# Altium PCB StudentForce.PcbDoc
Units mm, origin at the board's own origin, x right, y up, seen from the top; angles counter-clockwise.
Board outline 90 x 50 mm, 2 copper layers (Top Layer, Bottom Layer); 85 components, 55 nets, 268 pads, 87 vias.
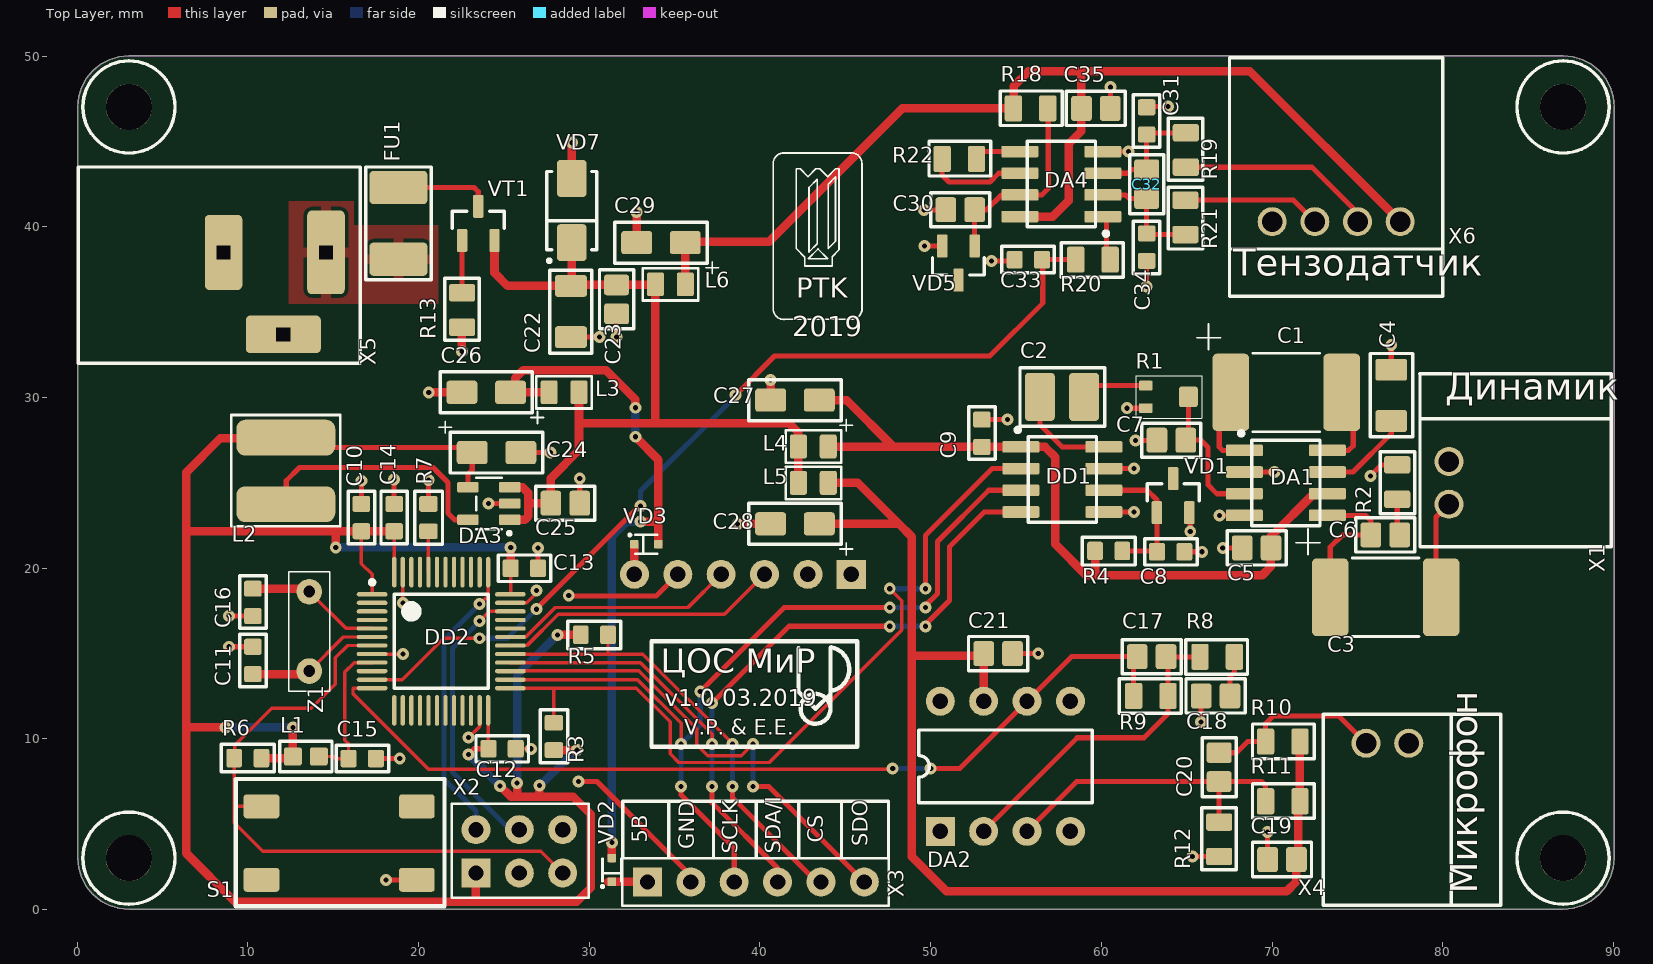
[diagram p0: Top Layer view]
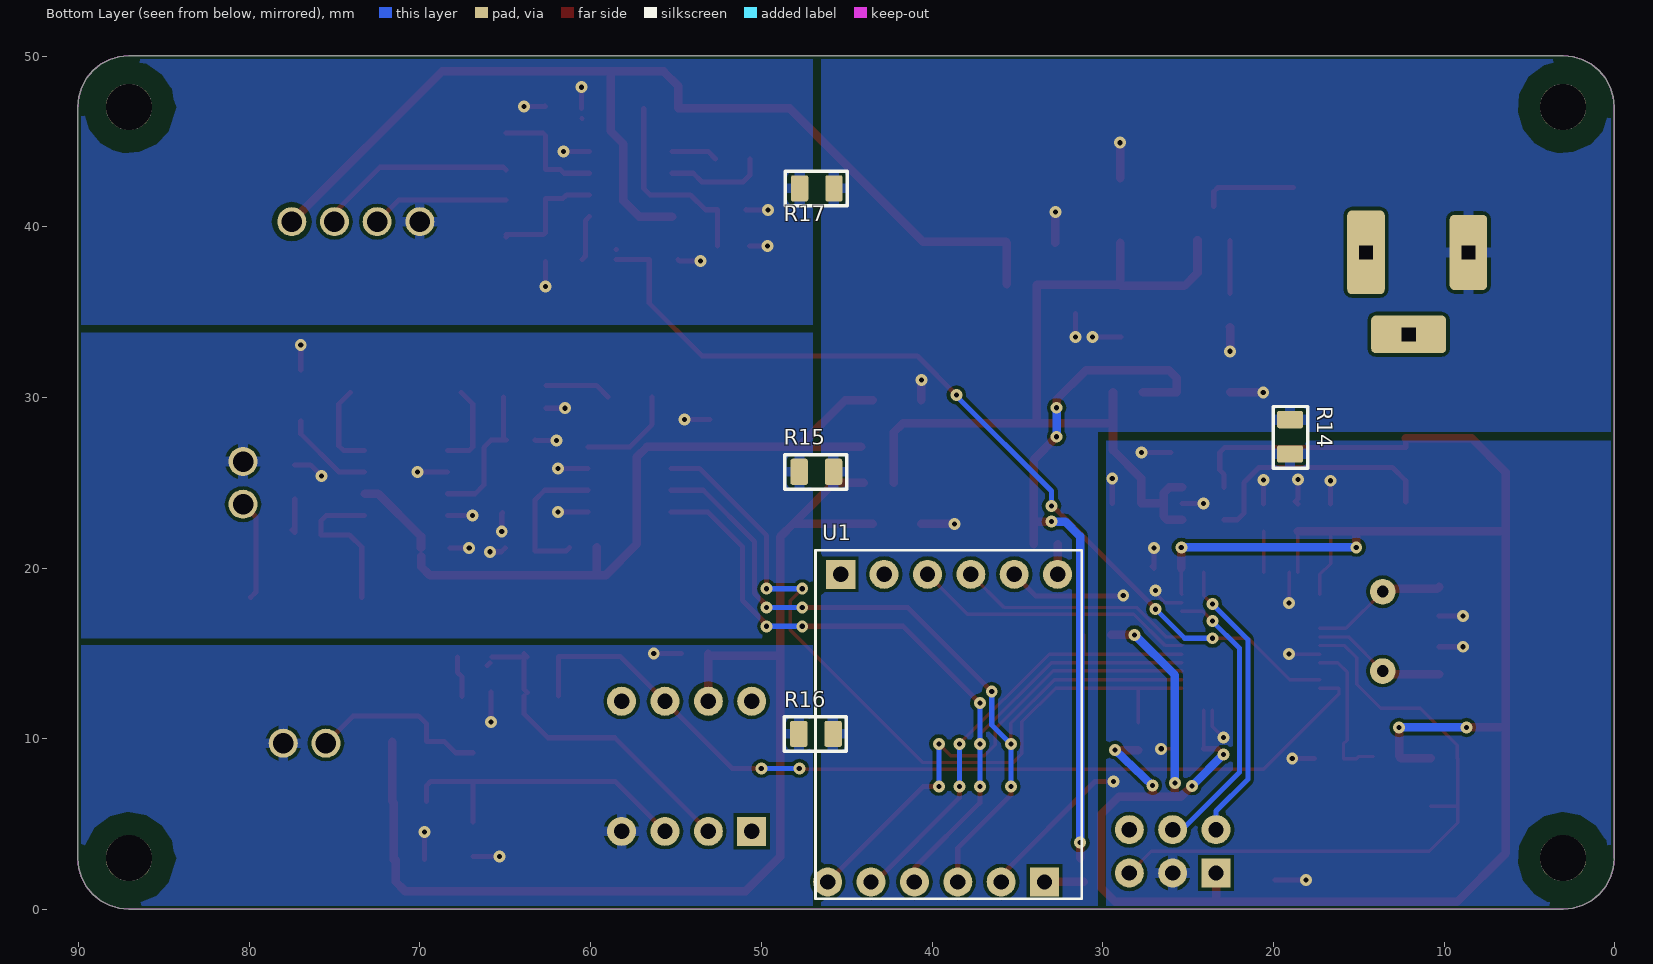
[diagram p1: Bottom Layer view, seen from below]

## Layer stack, top to bottom
Top Solder: solder mask 0.0102, Solder Resist, Dk 3.5
Top Layer: signal copper 0.0356
Dielectric 1: dielectric 0.32, FR-4, Dk 4.8
Bottom Layer: signal copper 0.0356
Bottom Solder: solder mask 0.0102, Solder Resist, Dk 3.5

## Board outline
0.544,1.352 0.266,1.871 0.096,2.434 0.038,3.019 0.038,47.019 0.096,47.604 0.266,48.167 0.544,48.686 0.917,49.14 1.371,49.513 1.89,49.791 2.453,49.961 3.038,50.019 87.038,50.019 87.623,49.961 88.186,49.791 88.705,49.513 89.159,49.14 89.532,48.686 89.81,48.167 89.98,47.604 90.038,47.019 90.038,3.019 89.98,2.434 89.81,1.871 89.532,1.352 89.159,0.898 88.705,0.525 88.186,0.247 87.623,0.077 87.038,0.019 3.038,0.019 2.453,0.077 1.89,0.247 1.371,0.525 0.917,0.898

## Design rules (kind name [scope] priority, off if disabled: settings)
Clearance Clearance_GND [InNet('5B') vs InNet('GND')] p1: gap=0.4 ignorepadtopadclearanceinfootprint=FALSE
Clearance Clearance_AGND_D [InNet('5BA_D') vs InNet('AGND_D')] p2: gap=0.4 ignorepadtopadclearanceinfootprint=FALSE
Clearance Clearance_AGND_M [InNet('5BA_M') vs InNet('AGND_M')] p3: gap=0.3 ignorepadtopadclearanceinfootprint=FALSE
Clearance Clearance_AGND_S [InNet('5BA_S') vs InNet('AGND_S')] p4: gap=0.3 ignorepadtopadclearanceinfootprint=FALSE
Clearance [All] p5: gap=0.2 ignorepadtopadclearanceinfootprint=FALSE
HoleSize [All] p1: absolutevalues=TRUE maxlimit=20 minlimit=0.025 maxpercent=80.000 minpercent=20.000
MinimumSolderMaskSliver [All] p1: minsoldermaskwidth=0.04
PasteMaskExpansion [All] p1: expansion=0.05
PolygonConnect PolygonConnect_via [All vs IsVia] p1: connectstyle=Direct reliefconductorwidth=0.254 reliefentries=4 polygonreliefangle="90 Angle" airgapwidth=0.254
PolygonConnect [All] p2: connectstyle=Relief reliefconductorwidth=0.6 reliefentries=4 polygonreliefangle="90 Angle" airgapwidth=0.2
RoutingVias [All] p1: holewidth=0.711 width=1.27 viastyle="Through Hole" minholewidth=0.711 minwidth=1.27 maxholewidth=0.711 maxwidth=1.27
SilkToSilkClearance [All] p1: silktosilkclearance=0
SilkToSolderMaskClearance [IsPad] p1: minsilkscreentomaskgap=0 clearancetoexposedcopper=TRUE
SolderMaskExpansion [All] p1: expansion=0.15
Width [All] p1: maxlimit=3 minlimit=0.15 preferedwidth=0.2
25 further rules are at their usual default settings.

## Classes and differential pairs
component class TensoStudent: C30 C31 C32 C33 C34 C35 C38 C39 C40 C41 C42 C44 C45 DA4 R18 R19 R20 R21 R22 VD5 X6
component class PowerStudent: C22 C23 C24 C25 C26 C27 C28 C29 DA3 FU1 L2 L3 L4 L5 L6 R13 R14 R15 R16 R17 VD7 VT1 X5
component class MicroStudent: C17 C18 C19 C20 C21 DA2 R8 R9 R10 R11 R12 X4
component class MCUStudent: C8 C9 C10 C11 C12 C13 C14 C15 C16 DD1 DD2 L1 R3 R4 R5 R6 R7 S1 U1 VD1 VD2 VD3 X2 X3 Z1
component class DynStudent: C1 C2 C3 C4 C5 C6 C7 DA1 R1 R2 X1

## Components (designator, comment, footprint, x,y, rotation, side; value= is the part's Value field where it differs from the comment)
C1 "Capacitor_pol" "TANTAL CASE D" 70.776,30.3 r0 top value=10мк
C2 "Capacitor" C1210 57.685,30.036 r0 top value=10мк
C3 "Capacitor_pol" "TANTAL CASE D" 76.6,18.3 r0 top value=220мк
C4 "Capacitor" C1206 77,30.1 r270 top value=10мк
C5 "Capacitor" C0805 69.087,21.188 r0 top value=0,1мк
C6 "Capacitor" C0805 76.625,21.95 r180 top value=0,15мк
C7 "Capacitor" C0805 64.095,27.5 r0 top value=0,01мк
C8 "Capacitor" C0603 64.057,20.963 r180 top value=0,1мк
C9 "Capacitor" C0603 53,27.905 r270 top value=0,1мк
C10 "Capacitor" C0603 16.652,22.966 r270 top value=0,1мк
C11 "Capacitor" C0603 10.3,14.6 r90 top value=22
C12 "Capacitor" C0603 24.893,9.425 r180 top value=0,1мк
C13 "Capacitor" C0603 26.2,20 r180 top value=0,1мк
C14 "Capacitor" C0603 18.575,22.966 r270 top value=0,1мк
C15 "Capacitor" C0603 16.7,8.85 r180 top value=0,1мк
C16 "Capacitor" C0603 10.3,18 r270 top value=22
C17 "Capacitor" C0805 62.937,14.82 r0 top value=1200
C18 "Capacitor" C0805 66.685,12.52 r0 top value=1мк
C19 "Capacitor" C0805 70.576,2.938 r180 top value=1200
C20 "Capacitor" C0805 66.895,8.35 r90 top value=1200
C21 "Capacitor" C0805 53.945,15 r0 top value=1200
C22 "Capacitor" C1206 28.9,35.064 r90 top value=10мк
C23 "Capacitor" C0805 31.6,35.749 r90 top value=0,1мк
C24 "Capacitor_pol" "TANTAL CASE A" 24.568,26.776 r0 top value=10мк
C25 "Capacitor" C0805 28.598,23.809 r180 top value=4,7мк
C26 "Capacitor_pol" "TANTAL CASE A" 23.965,30.307 r180 top value=10мк
C27 "Capacitor_pol" "TANTAL CASE A" 42.05,29.85 r180 top value=10мк
C28 "Capacitor_pol" "TANTAL CASE A" 42.05,22.6 r180 top value=10мк
C29 "Capacitor_pol" "TANTAL CASE A" 34.2,39.075 r180 top value=10мк
C30 "Capacitor" C0805 51.73,41 r0 top value=0,1мк
C31 "Capacitor" C0603 62.65,46.2 r90 top value=100
C32 "Capacitor" C0805 62.65,42.5 r90 top value=0,01мк
C33 "Capacitor" C0603 55.715,38.073 r0 top value=1000
C34 "Capacitor" C0603 62.65,38.803 r90 top value=100
C35 "Capacitor" C0805 59.675,46.93 r180 top value=0,1мк
DA1 "LM386M-1/NOPB" SO8 70.8,25 r0 top
DA2 "OPA137PA" DIP8 50.56,4.588 r90 top
DA3 "LM3671MF" SOT23-5 24.118,23.791 r180 top
DA4 "LM2904DT" SO8 57.65,42.5 r180 top
DD1 "MCP4921-E/P" SO8 57.71,25.2 r0 top
DD2 "STM32F103C8T6TR" LQFP48 21.33,15.723 r0 top
FU1 "Fuse" FUSE812 18.823,40.203 r90 top
L1 "Inductor" L0603 13.4,8.975 r0 top
L2 "Inductor" SDR0604 12.225,25.7 r180 top value=2,2мкГн
L3 "Inductor" L0805 28.525,30.307 r180 top value=0,18мкГн
L4 "Inductor" L0805 43.125,27.132 r0 top value=0,18мкГн
L5 "Inductor" L0805 43.125,25 r0 top value=0,18мкГн
L6 "Inductor" L0805 34.75,36.631 r0 top value=0,18мкГн
R1 "10к" Potentiometer 63.895,30.036 r270 top
R2 "Resistor_0,125Вт" R0805 77.325,25.05 r270 top value=10
R3 "Resistor_0,062Вт" R0603 27.925,10.15 r270 top value=10к
R4 "Resistor_0,062Вт" R0603 60.425,21.013 r180 top value=300
R5 "Resistor_0,062Вт" R0603 30.3,16.1 r180 top value=10к
R6 "Resistor_0,062Вт" R0603 10,8.875 r0 top value=10к
R7 "Resistor_0,062Вт" R0603 20.58,22.966 r270 top value=10к
R8 "Resistor_0,125Вт" R0805 66.78,14.81 r180 top value=3,3к
R9 "Resistor_0,125Вт" R0805 62.892,12.52 r180 top value=3,3к
R10 "Resistor_0,125Вт" R0805 70.621,9.85 r0 top value=3,3к
R11 "Resistor_0,125Вт" R0805 70.621,6.35 r0 top value=3,3к
R12 "Resistor_0,125Вт" R0805 66.895,4.125 r90 top value=3,3к
R13 "Resistor_0,125Вт" R0805 22.55,35.125 r90 top value=10к
R14 "Resistor_0,125Вт" R0805 19.025,27.7 r270 bottom value=0
R15 "Resistor_0,125Вт" R0805 46.775,25.65 r0 bottom value=0
R16 "Resistor_0,125Вт" R0805 46.8,10.3 r0 bottom value=0
R17 "Resistor_0,125Вт" R0805 46.75,42.25 r0 bottom value=0
R18 "Resistor_0,125Вт" R0805 55.85,46.93 r0 top value=30к
R19 "Resistor_0,125Вт" R0805 64.94,44.5 r90 top value=1к
R20 "Resistor_0,125Вт" R0805 59.5,38.073 r180 top value=1к
R21 "Resistor_0,125Вт" R0805 64.915,40.55 r270 top value=1к
R22 "Resistor_0,125Вт" R0805 51.675,43.975 r0 top value=500
S1 "RESET" Button_SMD 15.3,3.9 r180 top
U1 "USB UART" "USB UART CP2102" 39,19.643 r90 bottom
VD1 "LM4040BIM3-2.5/NOPB" SOT23-3 64.2,24.253 r90 top
VD2 "DiodeSchottky" SOD-523 31.325,2.325 r90 top
VD3 "DiodeSchottky" SOD-523 33.345,21.4 r0 top
VD5 "LM4040BIM3-2.5/NOPB" SOT23-3 51.625,37.875 r270 top
VD7 "DiodeZener" SMA 28.975,40.95 r90 top
VT1 "P-MOSFET" SOT23-3 23.5,40.2 r90 top
X1 "Динамик" CWF-2R 80.357,26.25 r0 top
X2 "Программатор" PLS2-6 25.903,2.147 r90 top
X3 "Header_6_plg" PLS-6 39.755,1.625 r90 top
X4 "Микрофон" CWF-2R 78,9.75 r270 top
X5 "Вход питания" DS-210 14.58,38.5 r0 top locked
X6 "Датчик силы" CWF-4R 75,40.3 r90 top
Z1 "Crystal" HC-49S 13.6,16.3 r270 top

## Footprints (in the part's own frame and the unit in brackets; to place one, negate y for a bottom-side part, rotate by r counter-clockwise, add the part's x,y. Pads: shape width x height; smd on the part's side, far side on the other; paste and mask are expansions set on the pad)
Button_SMD [mm] "Кнопка"
  rrect25% 2.1x1.4 smd: 1(-4.6,2.15) 2(4.5,2.15) 3(-4.6,-2.15) 4(4.5,-2.15)
  silkscreen extent -6.22,-3.75 6,3.7, body extent -4.5,-3 4.5,3, height 7
C0603 [mm]
  rrect25% 0.94x1.03 smd: 1(-0.8,0) 2(0.8,0)
  silkscreen extent -1.55,-0.77 1.53,0.77, body extent -0.8,-0.4 0.8,0.4, height 0.9
C0805 [mm]
  rrect25% 1.21x1.46 smd paste-5: 1(-0.845,0) 2(0.845,0)
  silkscreen extent -1.73,-1 1.73,1, body extent -1,-0.62 1,0.63, height 0.78
C1206 [mm]
  rrect25% 1.28x1.87 smd: 1(-1.528,-0.024) 2(1.472,-0.024)
  silkscreen extent -2.47,-1.25 2.4,1.22, body extent -1.6,-0.85 1.6,0.85, height 1.75
C1210 [mm]
  rrect25% 1.76x2.82 smd paste-5: 1(-1.295,0) 2(1.295,0)
  silkscreen extent -2.45,-1.73 2.51,1.7, body extent -1.62,-1.27 1.57,1.23, height 1.65
CWF-2R [mm]
  round 1.7 hole 1.2: 1(0,-2.5) 2(0,0)
  silkscreen extent -1.7,-5 9.5,2.5, body extent -1.55,-4.97 9.35,2.53, height 5.7
CWF-4R [mm]
  round 1.7 hole 1.2: 1(0,-2.5) 2(0,0) 3(0,2.5) 4(0,5)
  silkscreen extent -1.6,-5 9.6,7.5, body extent -1.5,-5 9.4,7.5, height 1
DIP8 [mm]
  rect 1.7x1.7 hole 0.9: 1(0,0)
  round 1.7 hole 0.9: 2(0,-2.54) 3(0,-5.08) 4(0,-7.62) 5(7.62,-7.62) 6(7.62,-5.08) 7(7.62,-2.54) 8(7.62,0)
  silkscreen extent 1.68,-8.89 5.94,1.27, body extent -0.12,-8.51 7.75,0.89, height 4.36
DS-210 [mm] "Гнездо питания 2,1х5,5мм на панель"
  rrect25% 2.2x4.9 hole 0.8 square: 1(0,0)
  rrect25% 2.2x4.4 hole 0.8 square: 2(-6,0)
  rrect25% 4.4x2.2 hole 0.8 square: 3(-2.5,-4.8)
  silkscreen extent -14.5,-6.5 2,5, body extent -13.79,-5 0.71,4.55, height 11.5
FUSE812 [mm] "Самовосстанавливающийся предохранитель"
  rrect25% 1.95x3.4 smd: 1(-2.1,0) 2(2.1,0)
  silkscreen extent -3.3,-1.93 3.3,1.93, body extent -2.41,-1.61 2.41,1.61, height 1.32
HC-49S [mm] "Кварцевый резонатор"
  round 1.5 hole 0.7: 1(-2.325,0) 2(2.325,0)
  silkscreen extent -3.5,-1.2 3.5,1.2, body extent -5.67,-2.32 5.68,2.33, height 3.6
L0603 [mm]
  rrect25% 1.05x1.07 smd paste-5: 1(-0.76,0) 2(0.76,0)
  silkscreen extent -1.53,-0.9 1.53,0.9, body extent -0.8,-0.4 0.8,0.4, height 0.8
L0805 [mm]
  rrect25% 1x1.4 smd: 1(-0.875,0) 2(0.875,0)
  silkscreen extent -1.63,-0.95 1.63,0.95, body extent -1,-0.6 1,0.6, height 0.95
LQFP48 [mm] "Thin QFP, 48-Leads, Body 7x7mm, Pitch 0.5mm, IPC Medium Density"
  oval 1.8x0.25 smd: 1(-4.05,2.75) 2(-4.05,2.25) 3(-4.05,1.75) 4(-4.05,1.25) 5(-4.05,0.75) 6(-4.05,0.25) 7(-4.05,-0.25) 8(-4.05,-0.75) 9(-4.05,-1.25) 10(-4.05,-1.75) 11(-4.05,-2.25) 12(-4.05,-2.75) 25(4.05,-2.75) 26(4.05,-2.25) 27(4.05,-1.75) 28(4.05,-1.25) 29(4.05,-0.75) 30(4.05,-0.25) 31(4.05,0.25) 32(4.05,0.75) 33(4.05,1.25) 34(4.05,1.75) 35(4.05,2.25) 36(4.05,2.75)
  oval 0.25x1.8 smd: 13(-2.75,-4.05) 14(-2.25,-4.05) 15(-1.75,-4.05) 16(-1.25,-4.05) 17(-0.75,-4.05) 18(-0.25,-4.05) 19(0.25,-4.05) 20(0.75,-4.05) 21(1.25,-4.05) 22(1.75,-4.05) 23(2.25,-4.05) 24(2.75,-4.05) 37(2.75,4.05) 38(2.25,4.05) 39(1.75,4.05) 40(1.25,4.05) 41(0.75,4.05) 42(0.25,4.05) 43(-0.25,4.05) 44(-0.75,4.05) 45(-1.25,4.05) 46(-1.75,4.05) 47(-2.25,4.05) 48(-2.75,4.05)
  silkscreen extent -4.17,-2.75 2.75,3.57, body extent -4.51,-4.51 4.51,4.51, height 1.46
PLS2-6 [mm] "Разъем для программатора ISP"
  rect 1.7x1.7 hole 0.9: 1(0,2.54)
  round 1.7 hole 0.9: 2(2.54,2.54) 3(0,0) 4(2.54,0) 5(0,-2.54) 6(2.54,-2.54)
  silkscreen extent -1.45,-4.08 4.05,3.95, body extent -1.26,-3.91 3.82,3.71, height 8.54
PLS-6 [mm]
  rect 1.7x1.7 hole 0.9: 1(0,6.345)
  round 1.7 hole 0.9: 2(0,3.805) 3(0,1.265) 5(0,-3.815) 6(0,-6.355)
  round 1.7 hole 0.9 mask+0.102: 4(0,-1.275)
  silkscreen extent -1.4,-7.78 1.4,7.82, body extent -1.27,-7.58 1.27,7.66, height 8.54
Potentiometer [mm]
  rrect25% 0.575x0.8 smd: 1(-0.663,-1.3) 3(0.662,-1.3)
  rrect25% 1.2x1.1 smd: 2(0,1.2)
  silkscreen extent -1.25,-1.9 1.25,1.97, body extent -1.1,-1.45 1.1,1.45, height 1.1
R0603 [mm]
  rrect25% 0.92x1.08 smd: 1(-0.8,0) 2(0.8,0)
  silkscreen extent -1.55,-0.8 1.55,0.82, body extent -0.8,-0.4 0.8,0.4, height 0.5
R0805 [mm] "Chip Resistor, 2-Leads, Body 2,10x1,30mm, IPC Medium Density"
  rrect25% 1.02x1.53 smd paste-5: 1(-1.008,0) 2(1.008,0)
  silkscreen extent -1.78,-1 1.85,1.02, body extent -1.1,-0.7 1.1,0.7, height 0.55
SDR0604 [mm] "SMD Power Inductors"
  rrect50% 5.8x2.1 smd: 1(0,1.95) 2(0,-1.95)
  silkscreen extent -3.2,-3.27 3.2,3.25, body extent -2.8,-2.75 2.8,2.75, height 4.55
SMA [mm]
  rrect25% 2.17x1.74 smd: 1(-1.88,0) 2(1.88,0)
  silkscreen extent -3.04,-1.46 2.29,1.46, body extent -2.5,-1.35 2.5,1.35, height 2.15
SO8 [mm]
  rrect25% 2.17x0.68 smd: 1(-2.43,1.905) 2(-2.43,0.635) 3(-2.43,-0.635) 4(-2.43,-1.905) 5(2.43,-1.905) 6(2.43,-0.635) 7(2.43,0.635) 8(2.43,1.905)
  silkscreen extent -2.74,-2.5 2,3.02, body extent -3,-2.54 3,2.54, height 1.7
SOD-523 [mm]
  rrect25% 0.5x0.5 smd: 1(-0.7,0) 2(0.7,0)
  silkscreen extent -1.04,-0.55 0.65,0.62, body extent -0.8,-0.4 0.8,0.4, height 0.7
SOT23-3 [mm]
  rrect25% 1.35x0.61 smd: 1(-1,0.95) 2(-1,-0.95) 3(1,0)
  silkscreen extent -0.3,-1.52 0.7,1.52, body extent -1.15,-1.5 1.15,1.5, height 1.1
SOT23-5 [mm]
  rrect25% 1.26x0.61 smd: 1(-1.225,0.95) 2(-1.225,0) 3(-1.225,-0.95) 4(1.225,-0.95) 5(1.225,0.95)
  silkscreen extent -1.3,-1.52 0.75,1.84, body extent -1.6,-1.56 1.6,1.55, height 1.45
"TANTAL CASE A" [mm]
  rrect25% 1.81x1.36 smd: 1(-1.425,0) 2(1.425,0)
  silkscreen extent -3.37,-1.2 2.7,1.82, body extent -1.7,-0.9 1.7,0.9, height 1.8
"TANTAL CASE D" [mm] "Конденсатор танталовый SMD"
  rrect25% 2.15x4.53 smd: 1(-3.2,0) 2(3.3,0)
  silkscreen extent -5.2,-2.3 2,4, body extent -3.8,-2.3 3.8,2.3, height 4
"USB UART CP2102" [mm]
  rect 1.7x1.7 hole 0.9: 1(0,6.345)
  round 1.7 hole 0.9: 2(0,3.805) 3(0,1.265) 5(0,-3.815) 6(0,-6.355)
  round 1.7 hole 0.9 mask+0.102: 4(0,-1.275)
  silkscreen extent -19,-7.78 1.4,7.82, body extent -1.27,-7.59 1.27,7.65, height 8.54

## Part data
C1: library part Polimer, "Конденсатор полярный", Part Number=ECASD41C106M060K, Voltage=16В, Part Name=Polimer, TKE=60mOhm
C2: library part cap193, "Конденсатор", Manufacture=Murata, Part Name=Ceramic, Part Number=GRM32ER61A106K, Voltage=25В, id=cap193, TKE=X7R
C3: library part cap192, "Конденсатор полярный", Manufacture=KEMET, Part Name=Tantal, Part Number=T491D227K016ZT, Voltage=10B, id=cap192
C4 C22: library part cap186, "Конденсатор", Manufacture=Murata, Part Name=Ceramic, Part Number=GRM31CR71E106KA12L*, Voltage=25В, id=cap186, TKE=X7R
C5: library part cap141, "Конденсатор", Manufacture=Murata, Part Name=Ceramic, Part Number=GRM21BR71H104K**, Voltage=50B, id=cap141, TKE=X7R
C6: library part cap142, "Конденсатор", Manufacture=Murata, Part Name=Ceramic, Part Number=GRM21BR71H154K, Voltage=50B, id=cap142, TKE=X7R
C7 C32: library part cap136, "Конденсатор", Manufacture=Murata, Part Name=Ceramic, Part Number=GRM216R71H103K, Voltage=50B, id=cap136, TKE=X7R
C8 C9 C10 C12 C13 C14 C15: library part cap131, "Конденсатор", Manufacture=Murata, Part Name=Ceramic, Part Number=GRM188R71H104KA93D, Voltage=50B, id=cap131, TKE=X7R
C11 C16: library part cap77, "Конденсатор", Manufacture=Yageo, Part Name=Ceramic, Part Number=CC0603JRNPO9BN220, Voltage=50B, id=cap77, TKE=NP0
C17 C19 C20 C21: library part cap166, "Конденсатор", Manufacture=Murata, Part Name=Ceramic, Part Number=GRM216R71H122K, Voltage=50В, id=cap166, TKE=X7R
C18: library part cap149, "Конденсатор", Manufacture=Murata, Part Name=Ceramic, Part Number=GRM21BR71C105K, Voltage=16B, id=cap149, TKE=X7R
C23 C30 C35: library part cap160, "Конденсатор", Manufacture=Murata, Part Name=Ceramic, Part Number=GRM21BR71H104KA01L, Voltage=50В, id=cap160, TKE=X7R
C24 C26 C27 C28 C29: library part cap199, "Конденсатор полярный", Manufacture=Vishay, Part Name=Tantal, Part Number=293D106X9016A2TE3, Voltage=16В, id=cap199
C25: library part cap153, "Конденсатор", Manufacture=Murata, Part Name=Ceramic, Part Number=GRM21BR61E475KA12L, Voltage=25B, id=cap153, TKE=X5R
C31 C34: library part cap91, "Конденсатор", Manufacture=Murata, Part Name=Ceramic, Part Number=GRM1885C1H101J, Voltage=50B, id=cap91, TKE=NP0
C33: library part cap113, "Конденсатор", Manufacture=Murata, Part Name=Ceramic, Part Number=GRM188R71H102K, Voltage=50B, id=cap113, TKE=X7R
DA1: "Low Voltage Audio Power Amplifier", Part Name="Audio Power Amplifier", Bandwidth=300кГц, Channels=1, Part Number=LM386M-1/NOPB
DA2: library part amp11, "FET-INPUT OPERATIONAL AMPLIFIERS", Input Bias Current=100pA, Manufacture="Texas Instruments", Offset voltage=2,5mB, Part Name="FET-INPUT Amplifier", Supply Voltage=4,5-36B, Bandwidth=1МГц, Channels=1, CMRR=76-84dB, id=amp11, Part Number=OPA137PA, PSRR=80,92dB, Rail-to-rail=yes
DA3: library part pwr2, "Step-Down DC-DC Converter", Current=0,6A, Input Voltage="2,7 - 5,5B", Manufacturer="Texas Instruments", Output Voltage=3,3B, Part Name="600-mA Step-Down DC-DC Converter", Part Number=LM3671MF-3.3/NOPB, id=pwr2, Type=Impulse
DA4: library part amp4, "Двухканальный операционный усилитель малой мощности", Input Bias Current=20nA, Manufacture="ST Microelectronics", Offset voltage=2mB, Part Name="DUAL OPERATIONAL AMPLIFIER", Supply Current max=0,7mA, Supply Voltage=32B, Bandwidth=1,1MHz, Channels=2, CMRR=85dB, id=amp4, Part Number=LM2904DT, PSRR=100dB, Rail-to-rail=Vcc-1,5B
DD1: library part interf10, "12-Bit DAC with SPI™ Interface", Manufacture=Microchip, Part Name="DAC - SPI Rail-to-Rail", Power Supply=2.7-5.5V, id=interf10, Number of Channel=2, Part Number=MCP4921-E/P, Resolution=12bit, Type Supply="Single Polar", Vref output=yes
DD2: library part microcont0, "Medium-density performance line ARM®-based 32-bit MCU with 64  or 128 KB Flash, USB, CAN, 7 timers, 2 ADCs, 9 com. interfaces", Frequency=72MHz, Part Name=Microcontroller, Power Supply="2.0-3.6 V", ADC=10x12b, Flash=64kb, id=microcont0, Interface="can, i2c, irda, lin, spi, uart, usb", Part Number=STM32F103C8T6TR, Pin in=37
FU1: library part fuse0, "Предохранитель", Manufacture=Bourns, Part Name="Resettable Fuses", Part Number=MF-MSMF075, Resistance=0,45Ohms, id=fuse0, I hold=0,75A, I max=100A, I trip=1,5A, V max=13,2B
L1: library part ind0, "EMI Suppression Filter", Part Name="EMI Suppression Filters", Part Number=BLM18PG181SN1D, Rated Current=1,5A, Resistance=0,09Ohm, id=ind0
L2: library part ind34, "EMI Suppression Filter", Manufacture=Bourns, Part Name="SMD Power Inductors", Part Number=SDR0604-2R2ML, Rated Current=2,8A, Resistance=0,06Ohm, Saturation Current=5,1A, id=ind34
L3 L4 L5 L6: library part ind2, "EMI Suppression Filter", Part Number=CM201212-R18KL, Rated Current=120-540мА, id=ind2, Part Name=Inductor
R1: library part res1931, "Potentiometer", Part Name="Trimming Potentiometer", Part Number=3302X-3-103, Power=0,15Вт, Accuracy=25%, id=res1931
R2: library part 10, "Резистор", Part Name=Resistor, Power=0,125Вт, Accuracy=1%
R3 R5 R6 R7: library part res483, "Резистор", Manufacture=Yageo, Part Name=Resistor, Part Number=RC0603FR-0710KL, Power=0,062Вт, Accuracy=0.01, id=res483
R4: library part res446, "Резистор", Manufacture=Yageo, Part Name=Resistor, Part Number=RC0603FR-07300RL, Power=0,062Вт, Accuracy=0.01, id=res446
R8 R9 R10 R11 R12: library part res85, "Резистор", Manufacture=Yageo, Part Name=Resistor, Part Number=RC0805FR-072K3, Power=0,125Вт, Accuracy=0.01, id=res85
R13: library part res97, "Резистор", Manufacture=Yageo, Part Name=Resistor, Part Number=RC0805FR-0710KL, Power=0,125Вт, Accuracy=0.01, id=res97
R14 R15 R16 R17: library part res0, "Резистор", Manufacture=Yageo, Part Name=Resistor, Part Number=RC0805FR-070RL, Power=0,125Вт, Accuracy=0.01, id=res0
R18: library part res108, "Резистор", Manufacture=Yageo, Part Name=Resistor, Part Number=RC0805FR-0730KL, Power=0,125Вт, Accuracy=0.01, id=res108
R19 R20 R21: library part res73, "Резистор", Manufacture=Yageo, Part Name=Resistor, Part Number=RC0805FR-071KL, Power=0,125Вт, Accuracy=0.01, id=res73
R22: library part res986, "Резистор", Manufacture=Yageo, Part Name=Resistor, Part Number=RC0805FR-07500RL, Power=0,125Вт, Accuracy=0.01, id=res986
S1: library part btn4, "Кнопка", Part Name="Button 5mm", id=btn4
U1: library part module2, "USB UART module cp2102", Part Name="USB UART CP2102", id=module2
VD1 VD5: "Прецезионный источник опорного напряжения", Output current=15mA, Part Name="Precision Micropower Shunt Voltage Reference", Voltage min stabilize=2,5B, Accuracy=0.002, id=ref0, Part Number=LM4040BIM3-2.5/NOPB
VD2 VD3: library part diode12, "Диод Шоттки", Breakdown Current=600uA, Capacitance=25pF, Forward Current=1А, Forward Voltage=0,62B, Manufacture="NXP Semiconductor", Max Reverse Voltage=20B, Part Name="Diode Schottky", Part Number=PMEG2010AEB.115, id=diode12, Number of Channels=1
VD7: library part SMAJ5.0A-TR, "Cтабилитрон (лавинный выпрямительный диод) односторонний", Breakdown Voltage=6,74B, Clamping voltage=13,4B, Dynamic resistance=49Ohm, Leakage Current=0,2uA, Manufacture="ST Microelectronics", Part Name="TVS diode Unidirectional", Peak Pulse Power=400W, Stand-off Voltage=5B, id=tvs155, Number of diodes=1, Part Number=SMAJ5.0A-TR
VT1: library part mosfet3, "N-MOSFET", Continuous drain current=4,3A, Gate-to-source voltage=(+-)8B, Part Name=Transistor, Part Number=IRLML6401TRPBF, Power dissipation=1,3W, Pulsed drain current=34A, id=mosfet3, Rds=0,05Ohm, Structure=p-channel, V drain-source max=(-12B)
X1 X4: library part connect7, "Разъем - 2 конт. розетка", Manufacture="Ningbo connfly electronic", Part Name="CWF-2R type A", Part Number="DS1069-2 MR-A", Etch=2,5mm, id=connect7
  X1: Contact_1=DYN+, Contact_2=DYN-
  X4: Contact_1=MIC+, Contact_2=MIC-
X2: library part connect0, "Разъем - 6 конт. розетка", Part Name=MKII, Contact_1=+3,3В, Contact_2=SWCLK, Contact_3=GND, Contact_4=SWDIO, Contact_5=NRST, Contact_6=Contact_6, id=connect0
X3: library part connect49, "Разъем - 6 конт. вилка", Part Name="Inertial Measurement Unit (IMU)", Part Number=MPU-9250, Contact_1=5В, Contact_2=GND, Contact_3=SCLK, Contact_4=SDA/I, Contact_5=CS, Contact_6=SDO, id=connect49
X5: library part connect1, "Разъем - 2 конт. розетка", Part Name="DC Power Jack", Part Number=DS-210B(PBT)(NB), Contact_1=+5В, Contact_2=GND, id=connect1
X6: library part DS1069-4MRW6SA, "Разъем - 4 конт. розетка", Part Name=CWF-4R, Contact_1=POWER, Contact_2=OUT+, Contact_3=OUT-, Contact_4=GND, Contact_5=Contact_5, Part Number=DS1069-4MRW6SA
Z1: library part crystal3, "Кварцевый резонатор", Frequence=8MHz, Part Number=8.000MHzHC-49US, id=crystal3

## Free pads (board coordinates)
  round 2.7 hole 2.7: ""(3.038,3.019) ""(3.038,47.019) ""(87.038,3.019) ""(87.038,47.019)

## Via types
v1: diameter 0.7, hole 0.3, Top Layer to Bottom Layer, tented both sides, 85 vias
v2: diameter 0.7, hole 0.3, Top Layer to Bottom Layer, 2 vias

## Nets (pads, with @x,y where several pads share a name; then routed paths per layer and width w, separated by ;. In a path a pad name is that pad's centre, name@x,y a point inside that pad or via, vN(x,y) a via of type N, cw(c..) or ccw(c..) an arc to the next point about the centre after c; other vN are vias at no path point)
5B: C22.2 C23.2 C25.2 DA3.1 DA3.3 L3.1 L4.1 L5.1 L6.1 VD7.1 VT1.2 | length 50.3
  Top Layer w0.5: VT1.2 24.45,37.304 25.218,36.536 C22.2 C22.2@28.975,36.587 ; DA3.1 26.228,22.841 26.423,23.036 26.423,23.766 ; DA3.3 26.092,24.741 26.423,24.41 26.423,23.766 ; VD7.1 C22.2@28.975,36.587 ; 29.4,28.6 L3.1 ; 33.875,28.6 33.875,36.594 C23.2 28.981,36.594 C22.2@28.975,36.587 ; L5.1 L4.1 42.25,27.95 41.705,28.495 33.036,28.495 33.031,28.5 32.369,28.5 32.364,28.495 29.4,28.495 29.4,26.917 27.753,25.271 C25.2 26.466,23.809 26.423,23.766
5BA_D: C5.2 C9.2 C27.1 DA1.6 DD1.1 L4.2 R4.2 | length 44.8
  Top Layer w0.5: C27.1 45.075,29.85 47.808,27.117 ; L4.2@44.14,27.117 47.808,27.117 ; R4.2@59.625,21.22 R4.2 59.625,19.617 59.6,19.592 ; C5.2@69.924,20.689 69.924,20.093 69.422,19.592 59.6,19.592 ; C5.2 69.932,21.862 72.435,24.365 DA1.6 ; 47.808,27.117 52.988,27.117 C9.2 DD1.1 56.695,27.105 57.3,26.5 57.3,21.4 59.108,19.592 59.6,19.592
5BA_M: C19.1 C21.1 C28.1 DA2.7 L5.2 R10.2 R11.2 | length 68.4
  Top Layer w0.5: C28.1 48.135,22.6 ; L5.2 45.735,25 48.135,22.6 ; DA2.7 C21.1@53.1,14.885 ; C21.1 C21.1@53.1,14.885 ; C19.1 71.421,1.649 70.85,1.078 50.922,1.078 48.894,3.106 48.894,14.885 ; C19.1@71.524,2.938 71.524,6.246 R11.2 R10.2 ; 48.135,22.6 48.894,21.841 48.894,14.885 ; 48.894,14.885 C21.1@53.1,14.885
5BA_S: C29.1 C35.2 DA4.8 L6.2 R18.1 X6.1 | length 64
  Top Layer w0.5: L6.2 C29.1 35.675,39.125 40.53,39.125 48.335,46.93 R18.1 54.868,46.93 54.868,48.244 55.723,49.1 58.83,49.1 ; DA4.8 57.146,40.595 58.075,41.524 58.075,44.85 58.83,45.605 C35.2 58.83,49.1 ; X6.1 68.7,49.1 58.83,49.1
5BD: C26.1 L3.2 VD2.2 VD3.2 | length 41.8
  Top Layer w0.5: L3.2 25.655,30.307 25.655,31.13 26.125,31.6 30.986,31.6 32.7,29.886 v1(32.7,29.4) ; VD2.2 v1(31.325,3.925) ; v1(32.7,27.7) 34.045,26.355 34.045,22.643 ; v1(33,22.733) 33.954,22.733 34.045,22.643 ; VD3.2 34.045,22.643
  Bottom Layer w0.5: v1(31.325,3.925) 31.325,21.863 32.195,22.733 v1(33,22.733) ; v1(32.7,27.7) v1(32.7,29.4)
+3,3В: C10.2 C12.2 C13.2 C14.2 C24.1 DA3.4 DD2.1 DD2.24 DD2.36 DD2.48 L1.1 L2.2 R3.2 R5.2 R6.2 X2.1 | length 145.3
  Top Layer w0.2: C10.2 16.652,20.271 17.28,19.643 DD2.1 ; C14.2 18.58,22.162 DD2.48 ; DD2.24 24.093,11.659 C12.2 ; DD2.36 25.4,18.493 C13.2
  Top Layer w0.3: L2.2@12.25,27.6 12.25,27.065 22.855,27.065 C24.1 23.143,25.75 22.893,25.5 DA3.4 ; v1(22.925,9.1) 23.25,9.425 C12.2
  Top Layer w0.5: v1(8.7,10.675) 6.39,10.675 ; R6.2 12.54,8.875 L1.1 v1(12.64,10.675) ; L2.2@12.25,27.6 8.375,27.6 6.39,25.615 6.39,22.166 ; v1(15.15,21.225) 15.15,22.091 15.075,22.166 ; C14.2 C10.2 15.075,22.166 ; X2.1 23.363,0.512 23.325,0.474 ; v1(24.775,7.25) 25.4,6.625 25.75,6.625 ; C13.2 v1(25.4,21.225) ; v1(25.775,7.425) 25.775,6.65 25.75,6.625 ; v1@27.125,7.275 v1(27.075,7.275) 27.075,6.65 27.1,6.625 ; R3.2 v1(29.275,9.35) ; v1(28.132,16.1) R5.2 ; 6.39,10.675 6.39,22.166 ; 6.39,10.675 6.39,3.31 9.226,0.474 23.325,0.474 ; 6.39,22.166 15.075,22.166 ; 23.325,0.474 29.274,0.474 30.075,1.275 30.075,5.6 29.05,6.625 27.1,6.625 ; 25.75,6.625 27.1,6.625
  Bottom Layer w0.5: v1(8.7,10.675) v1(12.64,10.675) ; v1(15.15,21.225) v1(25.4,21.225) ; v1(22.925,9.1) v1(24.775,7.25) ; v1(25.775,7.425) 25.775,13.743 v1(28.132,16.1) ; v1(27.075,7.275) v1(29.275,9.35)
AGND_D: C4.1 C5.1 C7.1 C8.1 C9.1 DA1.2 DA1.4 DD1.5 DD1.7 R1.3 R2.1 R15.2 VD1.2 X1.2 | length 17.2
  Top Layer w0.3: C9.1 v1(54.5,28.705) ; DD1.5 60.148,23.303 v1(61.91,23.303) ; DD1.7 v1(61.91,25.835) ; v1(61.5,29.374) R1.3 ; v1(62,27.475) 63.225,27.475 C7.1 ; C8.1@65,21.188 65.225,20.963 v1(65.9,20.963) ; VD1.2 65.203,23.2 v1(65.203,22.143) ; v1(66.912,23.095) DA1.4 ; v1(67.109,21.188) C5.1 ; DA1.2 v1(70.132,25.635) ; v1(75.749,25.4) 76.406,26.058 R2.1 ; C4.1 v1(76.976,33.086)
AGND_M: C18.1 C19.2 C21.2 DA2.4 R12.1 R16.2 X4.2 | length 6.5
  Top Layer w0.3: C21.2@54.69,15 C21.2 v1(56.3,15) ; v1(65.326,3.117) R12.1 ; v1(65.84,10.983) 65.84,12.485 C18.1 C18.1@65.84,12.739 ; C19.2 v1(69.731,4.543)
AGND_S: C30.1 C31.2 C33.1 C34.1 C35.1 DA4.4 R17.2 VD5.2 X6.4 | length 9.2
  Top Layer w0.3: v1(49.6,40.975) 50.86,40.975 C30.1 ; v1(49.625,38.875) VD5.2 ; v1(53.552,38) 54.797,38 C33.1@54.87,38.073 ; DA4.4 v1(61.575,44.405) ; C35.1@60.5,46.345 C35.1@60.508,46.337 ; C35.1 v1(60.52,48.175) ; v1(62.65,36.5) C34.1@62.65,37.958 ; C31.2@62.662,47.057 62.65,47.045 v1(63.895,47.045)
AUDIO_OUT: C2.1 DD1.8 | length 5.9
  Top Layer w0.3: C2.1 56.39,28.421 57.706,27.105 DD1.8
DGND: C10.1 C11.2 C12.1 C13.1 C14.1 C15.1 C16.2 C24.2 C25.1 DA3.2 DD2.8 DD2.23 DD2.35 DD2.47 R7.1 R14.2 S1.1 U1.5 X2.3 X3.2 | length 40.4
  Top Layer w0.2: DD2.8 v1(19.08,14.973) ; v1(19.08,17.973) DD2.47 ; v1(22.925,10.075) 23.58,10.73 DD2.23 ; DD2.35 26.326,17.973 26.9,18.547 v1(26.9,18.7) ; C12.1 v1(26.575,9.425)
  Top Layer w0.3: v2(8.9,15.4) C11.2 ; v2(8.9,17.2) C16.2 ; C10.1 v1(16.652,25.125) ; C15.1@17.6,8.85 v1(18.9,8.85) ; v1(18.1,1.75) S1.1 ; v1(18.573,25.2) 18.573,24.063 18.723,23.914 C14.1 ; v1(20.575,25.176) 20.58,25.171 R7.1 ; v1(24.093,23.791) DA3.2 ; C24.2 v1(27.739,26.776) ; v1(27,21.188) C13.1 C13.1@27.1,20.1 ; v1(28.8,18.403) 28.826,18.377 33.919,18.377 U1.5 ; v1(29.375,7.505) 30.449,7.505 35.95,2.004 X3.2 ; C25.1 v1(29.443,25.266)
GND: C22.1 C23.1 C26.2 C27.2 C28.2 C29.2 R13.1 R14.1 R15.1 R16.1 R17.1 VD7.2 X5.2 | length 13.4
  Top Layer w0.3: C22.1 v1(30.6,33.536) ; v1@31.6,33.526 v1(31.6,33.536) C23.1
  Top Layer w0.5: v1(20.6,30.3) 20.607,30.307 C26.2 ; v1(22.541,32.706) 22.541,34.108 R13.1 ; VD7.2 28.975,44.919 v1(28.981,44.925) ; C29.2 v1(32.775,40.875) ; v1(38.675,22.6) C28.2 ; C27.2 v1(40.625,31.025)
NetC1_1: C1.1 DA1.1 | length 5
  Top Layer w0.3: C1.1 66.9,29.624 66.9,27.1 67.095,26.905 DA1.1
NetC1_2: C1.2 DA1.8 | length 5
  Top Layer w0.3: DA1.8 74.478,26.905 74.749,27.176 74.749,29.627 C1.2
NetC2_2: C2.2 R1.1 | length 3.9
  Top Layer w0.3: C2.2 59.643,30.699 R1.1
NetC3_1: C3.1 C6.2 DA1.5 | length 9.1
  Top Layer w0.3: DA1.5 75.485,23.095 75.78,22.8 C6.2 74.112,21.95 73.4,21.238 C3.1
NetC3_2: C3.2 X1.1 | length 5.9
  Top Layer w0.3: C3.2 79.6,18.6 79.6,22.993 X1.1
NetC4_2: C4.2 DA1.7 | length 5.4
  Top Layer w0.3: DA1.7 74.735,25.635 76.976,27.876 C4.2
NetC6_1: C6.1 R2.2 | length 2.2
  Top Layer w0.3: C6.1@77.325,22.095 C6.1@77.325,22.395 ; R2.2 C6.1@77.325,22.395 ; C6.1@77.47,22.25 C6.1@77.325,22.395
NetC7_2: C7.2 DA1.3 R1.2 | length 8.6
  Top Layer w0.3: R1.2 65.095,27.655 C7.2 65.825,27.5 66.25,27.075 66.25,24.875 66.76,24.365 DA1.3
NetC8_2: C8.2 DD1.6 R4.1 VD1.1 | length 8.4
  Top Layer w0.3: DD1.6 62.685,24.565 63.25,24 VD1.1 63.25,21.013 61.432,21.013 R4.1@61.225,21.22
NetC11_1: C11.1 DD2.6 Z1.2 | length 7.6
  Top Layer w0.2: Z1.2 15.598,15.973 DD2.6
  Top Layer w0.5: C11.1 Z1.2@13.425,13.8
NetC15_2: C15.2 DD2.9 L1.2 | length 8.8
  Top Layer w0.2: L1.2 15,8.975 15.125,8.85 C15.2 15.9,9.719 15.685,9.935 15.685,13.921 16.237,14.473 DD2.9
NetC16_1: C16.1 DD2.5 Z1.1 | length 8
  Top Layer w0.2: Z1.1 15.752,16.473 DD2.5
  Top Layer w0.5: C16.1@10.3,18.9 10.4,18.8 13.425,18.8 Z1.1
NetC17_2: C17.2 DA2.2 R8.2 R9.1 | length 19.6
  Top Layer w0.3: DA2.2 58.585,10.073 62.493,10.073 63.9,11.48 R9.1 ; R9.1@63.705,12.715 63.895,12.905 C17.2@63.895,14.81 ; R8.2 C17.2@63.895,14.81 ; R8.2@65.887,14.46 R8.2@66.055,14.292 ; C17.2@63.895,14.81 63.895,14.99 63.715,14.81 C17.2@63.895,14.81
NetC18_2: C18.2 R8.1 | length 2.4
  Top Layer w0.3: C18.2@67.53,12.485 C18.2 67.53,13.643 67.787,13.9 R8.1
NetC20_1: C20.1 DA2.3 R11.1 R12.2 | length 18.6
  Top Layer w0.3: DA2.3 58.557,7.505 C20.1 ; R12.2 C20.1 ; R11.1 69.613,7.262 69.37,7.505 C20.1
NetC20_2: C20.2 R10.1 X4.1 | length 10.8
  Top Layer w0.3: C20.2 67.915,9.195 68.57,9.85 R10.1 69.613,10.894 70.069,11.35 73.9,11.35 X4.1
NetC30_2: C30.2 DA4.7 R18.2 VD5.1 | length 11.8
  Top Layer w0.3: VD5.1 C30.2 53.275,41 54.14,41.865 DA4.7 ; DA4.7@55.065,41.865 DA4.7 56.509,41.865 56.883,42.239 R18.2@56.883,46.93
NetC31_1: C31.1 C32.2 DA4.3 R19.2 | length 7
  Top Layer w0.3: DA4.3 61.55,43.135 61.76,43.345 C32.2 62.65,45.355 62.797,45.502 R19.2@64.94,45.502
NetC32_1: C32.1 C34.2 DA4.2 R21.2 | length 7.2
  Top Layer w0.3: DA4.2 61.415,41.865 61.625,41.655 C32.1 62.65,39.648 62.755,39.543 R21.2@64.8,39.543 ; R21.2@64.95,39.393 R21.2@64.8,39.543 ; R21.2@64.95,39.543 R21.2 R21.2@64.8,39.543
NetDA3_5: DA3.5 L2.1 | length 14.5
  Top Layer w0.3: L2.1@12.25,23.875 12.25,25.125 13.025,25.9 20.841,25.9 21.725,25.016 21.725,23.225 22.108,22.841 DA3.5
NetDA4_1: DA4.1 R20.1 | length 2.7
  Top Layer w0.3: DA4.1 60.3,40.375 60.3,38.28 R20.1
NetDA4_5: DA4.5 R22.2 | length 2.7
  Top Layer w0.3: R22.2 53.113,44.405 DA4.5
NetDA4_6: DA4.6 R22.1 | length 5.9
  Top Layer w0.3: R22.1 50.667,43.034 51.076,42.625 53.475,42.625 53.985,43.135 DA4.6
NetDD2_44: DD2.44 R7.2 | length 2.4
  Top Layer w0.2: DD2.44 R7.2
NetFU1_1: FU1.1 X5.1
NetFU1_2: FU1.2 VT1.3 | length 5.6
  Top Layer w0.3: FU1.2 23.247,42.303 23.5,42.05 VT1.3
NetR13_2: R13.2 VT1.1 | length 3.1
  Top Layer w0.3: R13.2@22.55,36.107 R13.2 VT1.1
NetR19_1: R19.1 X6.2 | length 11.7
  Top Layer w0.3: R19.1@64.95,43.337 65.1,43.487 72.338,43.487 75,40.825 X6.2
NetR21_1: R21.1 X6.3 | length 8.1
  Top Layer w0.3: R21.1@64.95,41.557 71.243,41.557 X6.3
NetU1_6: U1.6 VD3.1 | length 1.8
  Top Layer w0.5: U1.6 VD3.1
NetVD2_1: VD2.1 X3.1 | length 2.3
  Top Layer w0.5: VD2.1@31.1,1.625 VD2.1 X3.1
NRST: DD2.7 R6.1 S1.4 X2.5 | length 38.1
  Top Layer w0.2: R6.1 9.2,6.1 ; R6.1@9.237,8.837 9.237,9.637 11.4,11.8 13.717,11.8 15.125,13.208 15.125,14.75 15.848,15.473 DD2.7 ; S1.4 9.25,6.05 9.2,6.1 ; X2.5@28.44,1.598 X2.5@28.44,1.675 ; X2.5 27.165,3.425 10.875,3.425 9.2,5.1 9.2,6.1
PA1_ADC_IN1: C33.2 DD2.11 R20.2 | length 53.6
  Top Layer w0.2: DD2.11 19.053,13.473 21.48,15.9 v1(23.58,15.9) 23.6,15.9 v1@23.7,16
  Top Layer w0.3: v1@26.892,17.608 26.892,17.615 32.928,23.651 v1(33,23.651) ; v1(38.575,30.15) 40.85,32.425 53.46,32.425 56.56,35.525 56.56,38.073 R20.2
  Bottom Layer w0.3: v1(23.58,15.9) 25.2,15.9 v1(26.9,17.6) ; v1(33,23.651) 33,24.52 38.575,30.095 v1(38.575,30.15)
PA2_ADC_IN2: C17.1 DA2.6 DD2.12 R9.2 | length 54
  Top Layer w0.2: DD2.12 16.163,12.973 16.163,12.643 20.583,8.223 47.721,8.223 v1(47.773,8.275)
  Top Layer w0.3: v1(50,8.275) 51.707,8.275 DA2.6 58.252,14.82 61.885,14.82 R9.2
  Bottom Layer w0.3: v1(47.773,8.275) v1(50,8.275)
RX1: DD2.31 U1.4 | length 13.9
  Top Layer w0.2: DD2.31 26.287,15.973 28.014,17.7 35.782,17.7 U1.4
SPI2_CS0: DD1.2 DD2.25 R3.1 | length 46.2
  Top Layer w0.2: DD2.25 27.875,12.973 ; R3.1 27.925,12.923 27.875,12.973 ; v1(47.6,18.8) 48.3,18.1 48.3,16.381 40.542,8.623 35.241,8.623 34.733,9.131 34.733,11.001 32.761,12.973 27.875,12.973
  Top Layer w0.3: v1(49.7,18.8) 49.7,21.925 53.61,25.835 DD1.2
  Bottom Layer w0.3: v1(47.6,18.8) v1(49.7,18.8)
SPI2_CS1: DD2.29 R5.1 X3.5 | length 26.7
  Top Layer w0.2: DD2.29 31.1,14.973 ; R5.1 31.1,14.973 ; v1(38.4,9.708) 33.135,14.973 31.1,14.973
  Top Layer w0.3: v1(38.4,7.215) 38.4,6.55 43.325,1.625 X3.5
  Bottom Layer w0.3: v1@38.4,7.239 v1(38.4,9.708) v1@38.4,9.733
SPI2_MISO: DD2.27 X3.6 | length 28.5
  Top Layer w0.2: DD2.27 25.363,13.989 32.911,13.989 36.3,10.6 36.3,9.665 36.942,9.023 38.907,9.023 v1(39.6,9.716)
  Top Layer w0.3: v1(39.6,7.222) 40.513,7.222 X3.6
  Bottom Layer w0.3: v1(39.6,7.222) v1(39.6,9.716)
SPI2_MOSI: DD1.4 DD2.28 X3.4 | length 50.7
  Top Layer w0.2: DD2.28 33,14.473 37.2,10.273 v1(37.2,9.708)
  Top Layer w0.3: v1(37.2,7.215) 37.2,6.265 41.03,2.435 X3.4 ; v1(37.2,12.106) 41.694,16.6 v1(47.6,16.6) ; v1(49.7,16.6) 49.7,16.71 51.1,18.11 51.1,21.262 53.133,23.295 DD1.4
  Bottom Layer w0.3: v1@37.2,7.323 v1(37.2,9.708) v1(37.2,12.106) ; v1(47.6,16.6) v1(49.7,16.6)
SPI2_SCK: DD1.3 DD2.26 X3.3 | length 50.7
  Top Layer w0.2: DD2.26 32.827,13.473 35.383,10.917 v1(35.383,9.708)
  Top Layer w0.3: v1(35.383,7.215) 35.383,6.717 38.49,3.61 X3.3 ; v1(36.5,12.777) 41.423,17.7 v1(47.6,17.7) ; v1(49.7,17.7) 49.7,17.81 50.4,18.51 50.4,21.565 53.4,24.565 DD1.3
  Bottom Layer w0.3: v1(35.383,7.215) v1(35.383,9.708) 36.5,10.825 v1(36.5,12.777) ; v1(47.6,17.7) v1(49.7,17.7)
SWCLK: DD2.37 X2.2 | length 17.5
  Top Layer w0.2: v1(23.58,17.9) 24.08,18.4 DD2.37
  Bottom Layer w0.3: X2.2@23.36,4.138 23.36,5.773 21.5,7.633 21.5,15.82 v1(23.58,17.9)
SWDIO: DD2.34 X2.4 | length 17.1
  Top Layer w0.2: v1(23.58,16.9) 24.152,17.473 DD2.34
  Bottom Layer w0.3: v1(23.58,16.9) 22,15.32 22,8.038 X2.4@25.9,4.138
TX1: DD2.30 U1.3 | length 16.6
  Top Layer w0.2: DD2.30 26.352,15.473 28.179,17.3 37.922,17.3 U1.3
pads on no net: DA2.1 DA2.5 DA2.8 DD2.2 DD2.3 DD2.4 DD2.10 DD2.13 DD2.14 DD2.15 DD2.16 DD2.17 DD2.18 DD2.19 DD2.20 DD2.21 DD2.22 DD2.32 DD2.33 DD2.38 DD2.39 DD2.40 DD2.41 DD2.42 DD2.43 DD2.45 DD2.46 S1.2 S1.3 U1.1 U1.2 VD1.3 VD5.3 X2.6 X5.3

## Polygon pours and split planes (outlines as drawn)
NetFU1_1 on Top Layer "Top Layer-No Net" (solid, remove dead copper, pour order 0): 12.4,35.5 21.15,35.5 21.15,40.1 16.2,40.1 16.2,41.5 12.4,41.5 12.4,39.75
AGND_M on Bottom Layer "Top Layer-No Net" (solid, remove dead copper, pour order 10): 47,0.017 47,15.5 90.038,15.5 90.038,0.016
DGND on Bottom Layer "Bottom Layer-No Net" (solid, remove dead copper, pour order 20): 0.2,27.475 0.2,0.125 29.8,0.125 29.8,27.475
AGND_S on Bottom Layer "Top Layer-No Net" (solid, remove dead copper, pour order 8): 47,50 47,34.25 89.98,34.25 89.98,50
AGND_D on Bottom Layer "Bottom Layer-No Net 1" (solid, remove dead copper, pour order 18): 47,33.8 47,15.9 89.9,15.9 89.9,33.8
GND on Bottom Layer "Top Layer-No Net" (solid, remove dead copper, pour order 6): 0.038,28 30.3,28 30.3,0.019 46.477,0.019 46.477,50.019 0.038,50.019

## Keep-outs
Keep-Out Layer:
  the board outline again, w0.01

## Other copper
Bottom Layer:
  pour cut-out: 0.248,47 0.4,47.465 0.491,48.07 0.621,48.2 1.1,48.907 2,49.537 3.1,49.738 4.163,49.475 5.072,48.788 5.639,47.749 5.687,46.709 5.4,45.7 4.732,44.898 4,44.474 3.334,44.3 2.4,44.4 1.4,44.821 0.7,45.58
  pour cut-out: 84.248,47 84.4,47.465 84.491,48.07 84.621,48.2 85.1,48.907 86,49.537 87.1,49.738 88.163,49.475 89.072,48.788 89.639,47.749 89.687,46.709 89.4,45.7 88.732,44.898 88,44.474 87.334,44.3 86.4,44.4 85.4,44.821 84.7,45.58
  pour cut-out: 84.248,3 84.4,3.465 84.491,4.07 84.621,4.2 85.1,4.907 86,5.537 87.1,5.738 88.163,5.475 89.072,4.788 89.639,3.749 89.687,2.709 89.4,1.7 88.732,0.898 88,0.474 87.334,0.3 86.4,0.4 85.4,0.821 84.7,1.58
  pour cut-out: 0.248,3 0.4,3.465 0.491,4.07 0.621,4.2 1.1,4.907 2,5.537 3.1,5.738 4.163,5.475 5.072,4.788 5.639,3.749 5.687,2.709 5.4,1.7 4.732,0.898 4,0.474 3.334,0.3 2.4,0.4 1.4,0.821 0.7,1.58

## Silkscreen, mask and mechanical layers (free items; w line width, h text height)
Top Overlay:
  circle w0.254: c43.25,11.767 r0.875
  circle w0.2: c87.038,47.019 r2.7
  circle w0.2: c87.038,3.019 r2.7
  circle w0.2: c3.038,47.019 r2.7
  circle w0.2: c3.038,3.019 r2.7
  lines w0.1: 40.771,43.699 cw(c41.397,43.7) 41.4,44.325 45.349,44.325 ; 40.775,43.675 40.775,35.2 ccw(c41.4,35.197) 41.401,34.571 ; 41.401,34.575 45.375,34.575 ; 45.349,44.329 cw(c45.35,43.703) 45.975,43.7 cw(c45.966,43.691) 45.979,43.691 45.979,35.201 cw(c45.353,35.2) 45.35,34.575 ; 42.125,38.725 42.625,38.225 42.625,37.7 44.225,37.7 44.225,38.25 44.625,38.65 44.625,43.4 44.425,43.4 43.962,42.937 43.5,43.4 43.275,43.4 42.812,42.937 42.35,43.4 42.125,43.4 42.125,38.725 ; 42.825,38.125 43.975,38.125 43.4,38.7 42.825,38.125 ; 42.875,38.525 42.875,42.3 43.35,42.775 43.35,39 42.875,38.525 ; 44,38.725 44.425,39.15 44.425,42.925 44,42.5 44,38.725
  lines w0.2: 31.955,3.015 31.955,6.345 47.529,6.345 47.529,3.041 ; 34.65,3.05 34.65,6.345 ; 37.275,3.05 37.275,6.345 ; 39.775,3.075 39.775,6.32 ; 42.275,3.06 42.275,6.345 ; 44.775,3.05 44.775,6.345 ; 67.5,38.7 67.5,35.931 80,35.931 80,38.7 ; 78.657,28.75 78.657,31.393 78.65,31.4 89.857,31.4 89.857,28.75 ; 80.5,0.25 83.382,0.25 83.382,11.45 80.5,11.45
  lines w0.25: 42.25,15.317 42.25,12.767 43.25,11.767 44.125,12.642 44.125,15.342 ; 44.125,11.667 44.125,13.117 ; 33.65,9.542 45.7,9.542 45.7,15.717 33.65,15.717 33.65,9.542
  lines w0.254: 44.181,15.372 cw(c43.925,14.092) 44.306,12.843
  text "Тензодатчик" at 67.73,36.6 h2.7
  text "PTK" at 42.125,35.475 h2
  text "2019" at 41.9,33.2 h2
  text "Динамик" at 80.15,29.35 h2.7
  text "ЦОС МиР" at 34.2,13.4 h2.4
  text "v1.0 03.2019" at 34.425,11.55 h1.7
  text "V.P. & E.E." at 35.575,9.95 h1.52
  text "5В" at 33.7,3.925 h1.52 r90
  text "CS" at 44,3.925 h1.52 r90
  text "SDO" at 46.6,3.725 h1.52 r90
  text "GND" at 36.439,3.525 h1.52 r90
  text "SCLK" at 39,3.263 h1.52 r90
  text "SDA/I" at 41.5,3.263 h1.52 r90
  text "Микрофон" at 82.55,0.921 h2.7 r90